# Allegro board HM10_KIT.brd
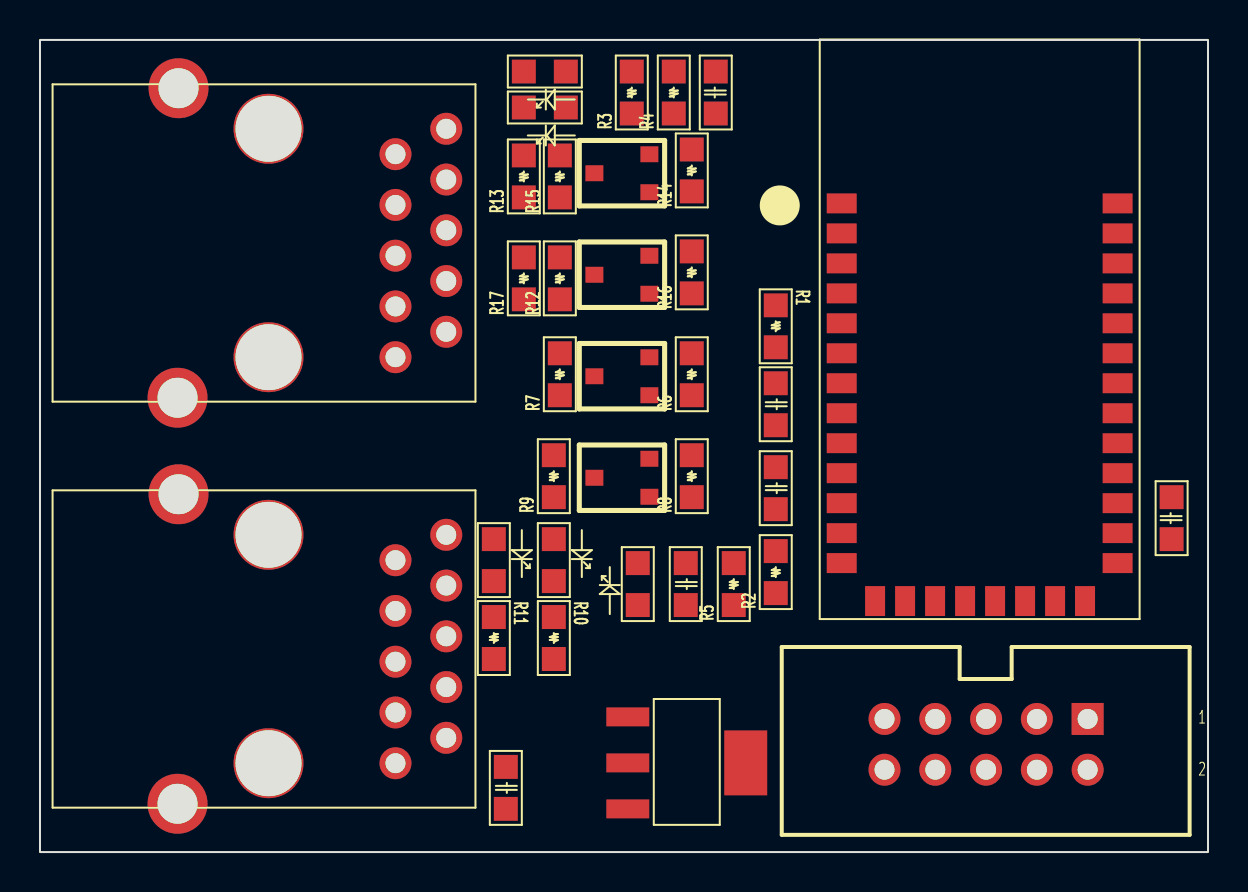
[diagram p0: board, top side]
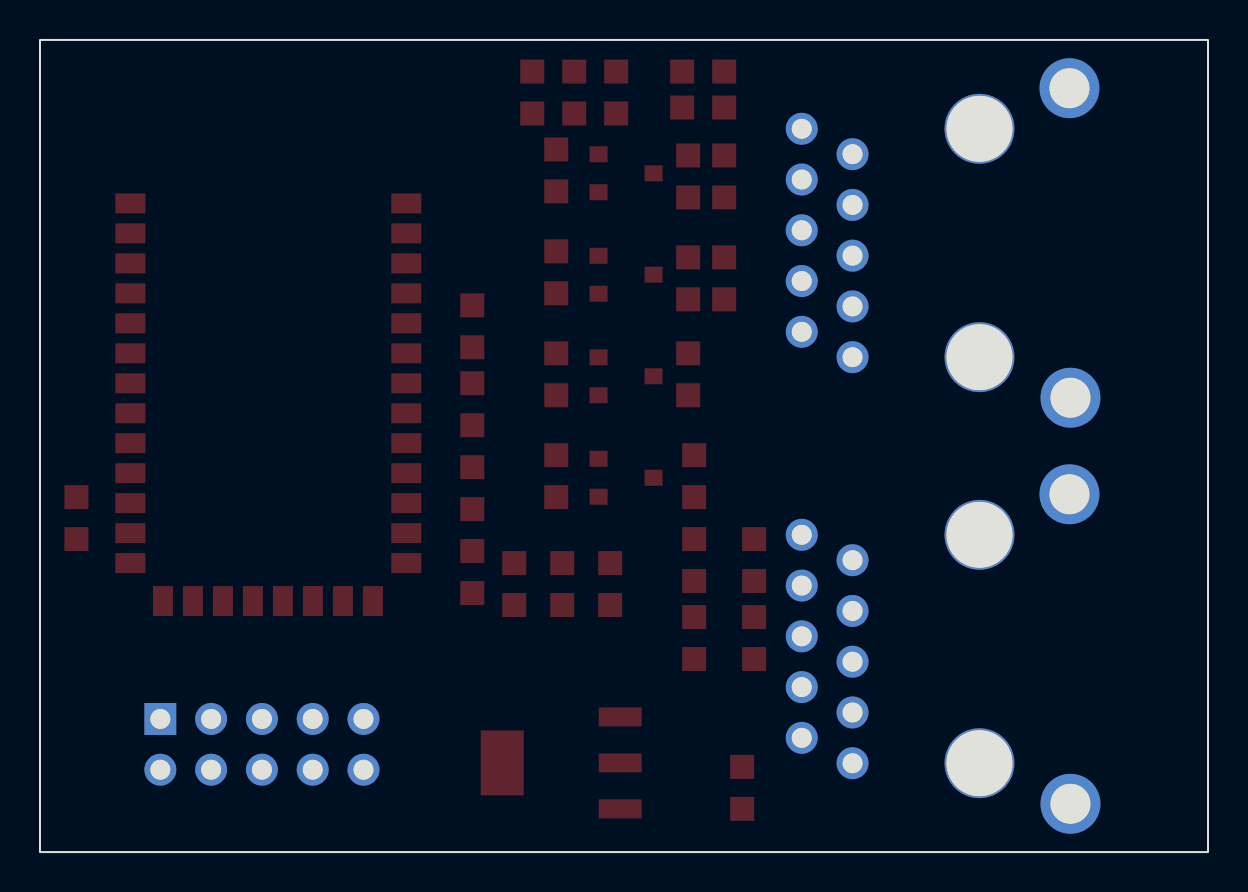
[diagram p1: board, bottom side, seen from below]

Outline 58.42 x 40.64 mm; copper layers: TOP, BOTTOM. Coordinates in mm from the lower left corner of the outline.
Outline path: rectangle 0,0 58.42,40.64

## Design rules (mm)
constraint set DEFAULT: min track width 0.3

## Placement (name value [footprint] x y rotation side)
C1  1nF  [CAP_SMD_0805]  36.8 17.16 90 top
C2  100nF  [CAP_SMD_0805]  36.8 21.36 90 top
C3  100nF  [CAP_SMD_0805]  23.3 2.16 90 top
C4  100nF  [CAP_SMD_0805]  32.3 12.36 90 top
C5  100nF  [CAP_SMD_0805]  33.8 39.06 270 top
C6  100nF  [CAP_SMD_0805]  56.6 17.76 270 top
CN1  To TiMotion Box  [RJ10F_V2]  17.78 10.16 270 top
CN2  From TiMotion habdset  [RJ10F_V2]  17.78 30.48 270 top
D1  LED  [LED_SMD_0805]  29.9 14.46 270 top
D2  LED  [LED_SMD_0805]  25.7 13.56 90 top
D3  LED  [LED_SMD_0805]  22.7 13.56 90 top
D4  LED  [LED_SMD_0805]  24.2 37.26 0 top
D5  LED  [LED_SMD_0805]  24.2 39.06 0 top
J1  CONN TRBLK 5x2  [HEADER5X2X254]  52.4 6.66 0 top
Q1  2302  [SOT23]  30.48 22.86 270 top
Q2  2302  [SOT23]  30.48 17.78 270 top
Q3  2302  [SOT23]  30.48 27.94 270 top
Q4  2302  [SOT23]  30.48 33.02 270 top
R1  10K  [RES_SMD_0805]  36.8 27.36 270 top
R2  10K  [RES_SMD_0805]  36.8 12.96 90 top
R3  10K  [RES_SMD_0805]  29.6 36.96 90 top
R4  10K  [RES_SMD_0805]  31.7 36.96 90 top
R5  1K  [RES_SMD_0805]  34.7 12.36 90 top
R6  4K7  [RES_SMD_0805]  32.6 22.86 90 top
R7  4K7  [RES_SMD_0805]  26 22.86 90 top
R8  4K7  [RES_SMD_0805]  32.6 17.76 90 top
R9  4K7  [RES_SMD_0805]  25.7 17.76 90 top
R10  1K  [RES_SMD_0805]  25.7 11.76 270 top
R11  1K  [RES_SMD_0805]  22.7 11.76 270 top
R12  1K  [RES_SMD_0805]  26 27.66 90 top
R13  1K  [RES_SMD_0805]  24.2 32.76 90 top
R14  4K7  [RES_SMD_0805]  32.6 33.06 90 top
R15  4K7  [RES_SMD_0805]  26 32.76 90 top
R16  4K7  [RES_SMD_0805]  32.6 27.96 90 top
R17  4K7  [RES_SMD_0805]  24.2 27.66 90 top
U1  HM-10  [HC05]  53.9 32.46 0 top
U2  AMS1117  [SOT223]  32.3 4.56 270 top

## Library data of the parts
C1-C6 = CAPACITOR NON-POL
CN1 = RJ10F-TiMotion_8
CN2 = RJ10F-TiMotion_9
D1-D5 = LED
J1 = CONN TRBLK 5x2
Q1-Q4 = IRF1010E/TO_0
R1-R17 = R
U1 = HM-10_3
U2 = ASM1117

## Footprints (pads in the part's own frame, mm; a bottom-side part is the same pattern mirrored in y, then rotated)
CAP_SMD_0805
  rect 1.2x1.2 smd: 1(0,0) 2(2.1,0)
HC05
  rect 1.5x1 smd: 1(-13.8,0) 2(-13.8,-1.5) 3(-13.8,-3) 4(-13.8,-4.5) 5(-13.8,-6) 6(-13.8,-7.5) 7(-13.8,-9) 8(-13.8,-10.5) 9(-13.8,-12) 10(-13.8,-13.5) 11(-13.8,-15) 12(-13.8,-16.5) 13(-13.8,-18) 22(0,-18) 23(0,-16.5) 24(0,-15) 25(0,-13.5) 26(0,-12) 27(0,-10.5) 28(0,-9) 29(0,-7.5) 30(0,-6) 31(0,-4.5) 32(0,-3) 33(0,-1.5) 34(0,0)
  rect 1x1.5 smd: 14(-12.13,-19.9) 15(-10.63,-19.9) 16(-9.13,-19.9) 17(-7.63,-19.9) 18(-6.13,-19.9) 19(-4.63,-19.9) 20(-3.13,-19.9) 21(-1.63,-19.9)
HEADER5X2X254
  rect 1.6x1.6 hole 1: 1(0,0)
  round 1.6 hole 1: 2(0,-2.54) 3(-2.54,0) 4(-2.54,-2.54) 5(-5.08,0) 6(-5.08,-2.54) 7(-7.62,0) 8(-7.62,-2.54) 9(-10.16,0) 10(-10.16,-2.54)
LED_SMD_0805
  rect 1.2x1.2 smd: 1(0,0) 2(2.1,0)
RES_SMD_0805
  rect 1.2x1.2 smd: 1(0,0) 2(2.1,0)
RJ10F_V2
  round 1.6 hole 1: 1(5.715,0) 2(4.445,2.54) 3(3.175,0) 4(1.905,2.54) 5(0.635,0) 6(-0.635,2.54) 7(-1.905,0) 8(-3.175,2.54) 9(-4.445,0) 10(-5.715,2.54)
  round 3.5 hole 3.3: 11(-5.715,-6.35) 12(5.715,-6.35)
  round 3 hole 2: 13(-7.745,-10.85) 14(7.745,-10.9)
SOT23
  rect 0.8x0.9 smd: 1(0,0) 2(-1.9,0) 3(-0.95,-2.75)
SOT223
  rect 3.25x2.15 smd: (0.1,3)
  rect 0.95x2.15 smd: 1(-2.201,-2.901) 2(0.099,-2.901) 3(2.399,-2.901)

## Nets
3V3: C2.2 C4.1 J1.9 Q1.1 Q2.1 Q3.1 Q4.1 R1.1 R3.1 R4.1 R5.1 R6.1 R8.1 R14.1 R16.1 U1.12 U2.2(VOUT)
5V: C3.1 CN1.1 CN2.1 D2.2 D3.2 D4.2 D5.2 J1.2 R7.1 R9.1 R15.1 R17.1 U2.3
GND: C1.2 C2.1 C3.2 C4.2 C5.2 C6.2 CN1.4 CN2.4 D1.1(CATHODE) J1.1 U1.22 U2.1
DC: J1.3 R1.2 U1.7
DD: J1.4 U1.8
HS_DOWN: C5.1 CN2.6 R3.2 U1.28
HS_RX: CN2.3 Q4.3 R13.2 R15.2
HS_TX: CN2.2 Q3.3 R12.2 R17.2
HS_UP: C6.1 CN2.5(UP) R4.2 U1.27
RESET: J1.7 R2.1
RX0: Q1.2(S) R6.2 U1.3
RX1: Q3.2(S) R16.2 U1.2
TIM_RX: CN1.2 Q2.3 R9.2 R11.2
TIM_TX: CN1.3 Q1.3 R7.2 R10.2
TX0: Q2.2(S) R8.2 U1.4
TX1: Q4.2(S) R14.2 U1.1
N01080: C1.1 R2.2 U1.11
N014891: D1.2 R5.2
N7119740: D2.1(CATHODE) R10.1
N7119940: D3.1(CATHODE) R11.1
N7120140: D4.1(CATHODE) R12.1
N7120340: D5.1(CATHODE) R13.1

Pads without a net: CN1 5 6 7 8 9 10 11 12 13 14; CN2 7 8 9 10 11 12 13 14; J1 5 6 8 10; U1 5 6 9 10 13 14 15 16 17 18 19 20 21 23 24 25 26 29 30 31 32 33 34
